# Altium PCB pcb_mk32_dsd_2022-03-23.pcbdoc
Units mil, origin at the board's own origin, x right, y up, seen from the top; angles counter-clockwise.
Board outline 3674 x 4768 mil, 2 copper layers (Top Layer, Bottom Layer); 101 components, 77 nets, 393 pads, 87 vias.
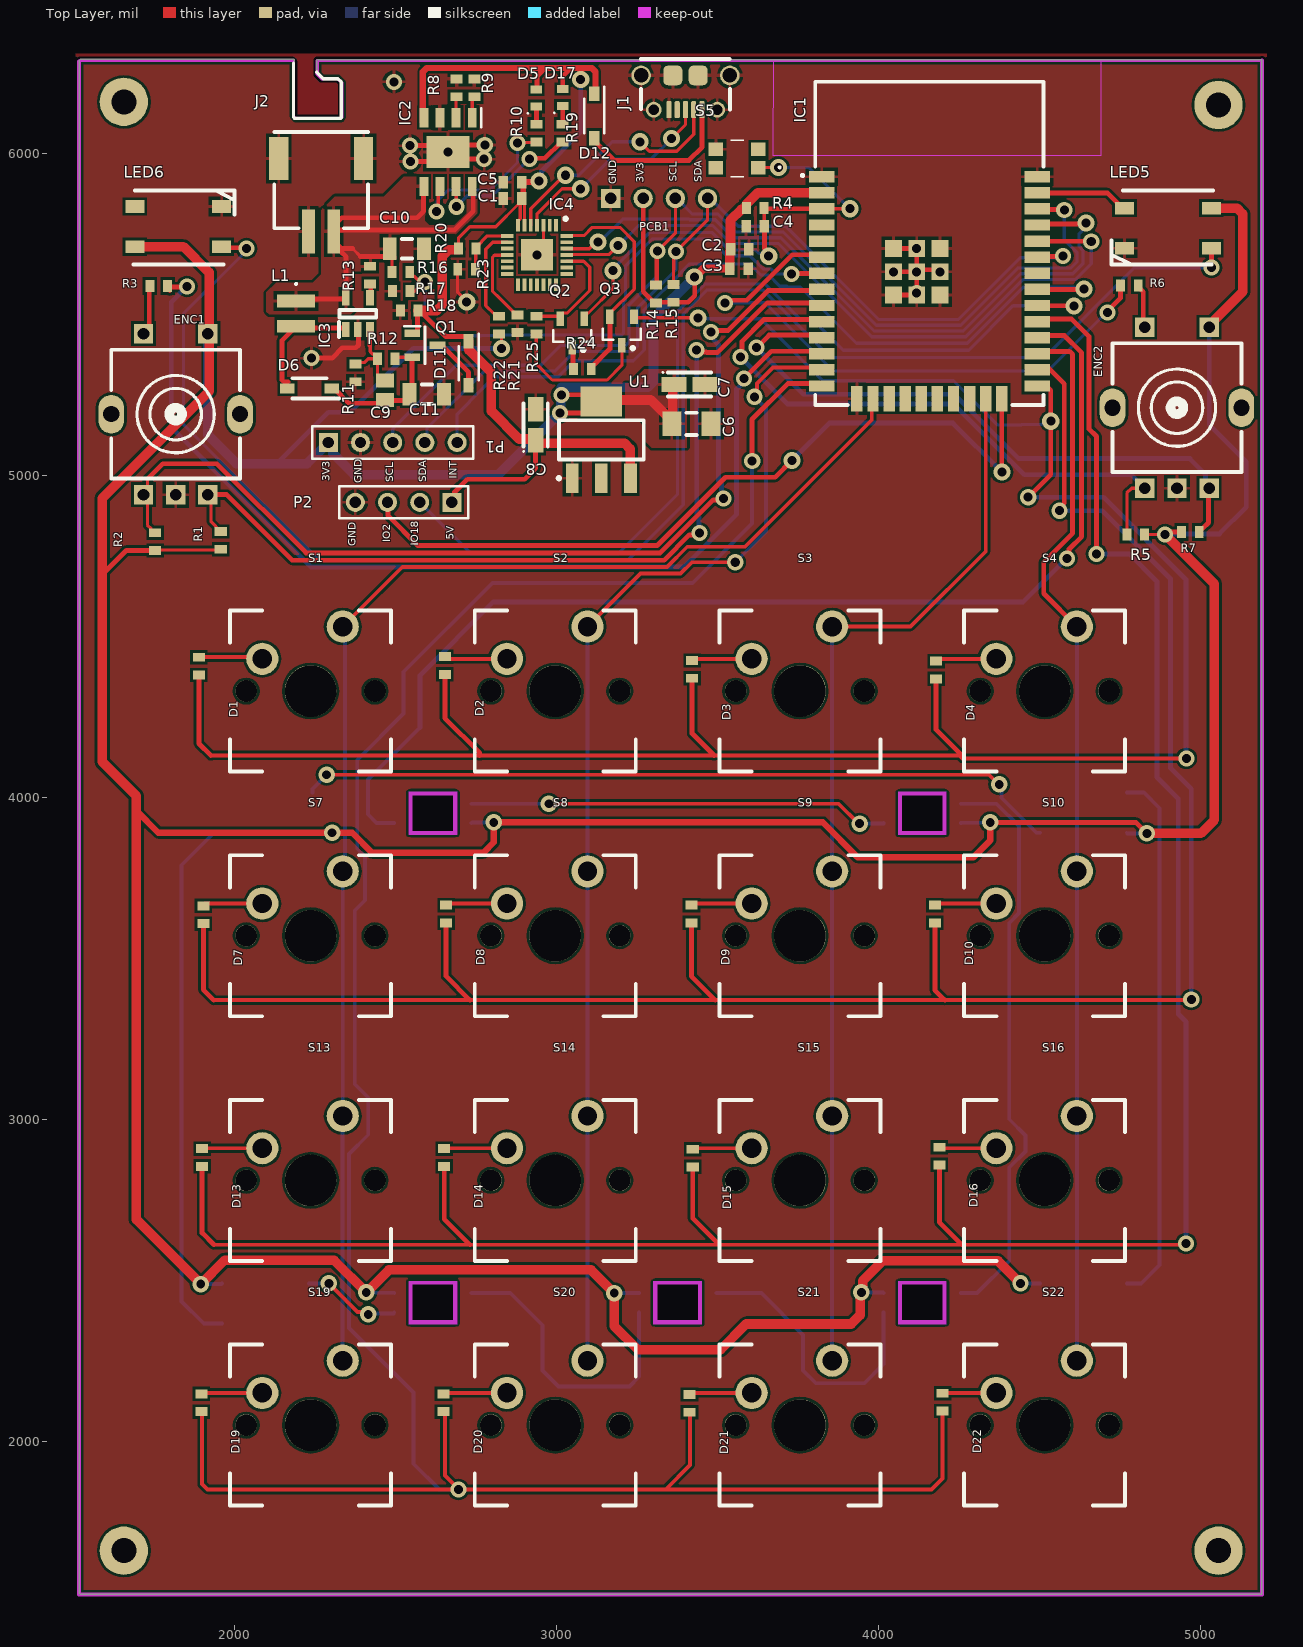
[diagram p0: Top Layer view]
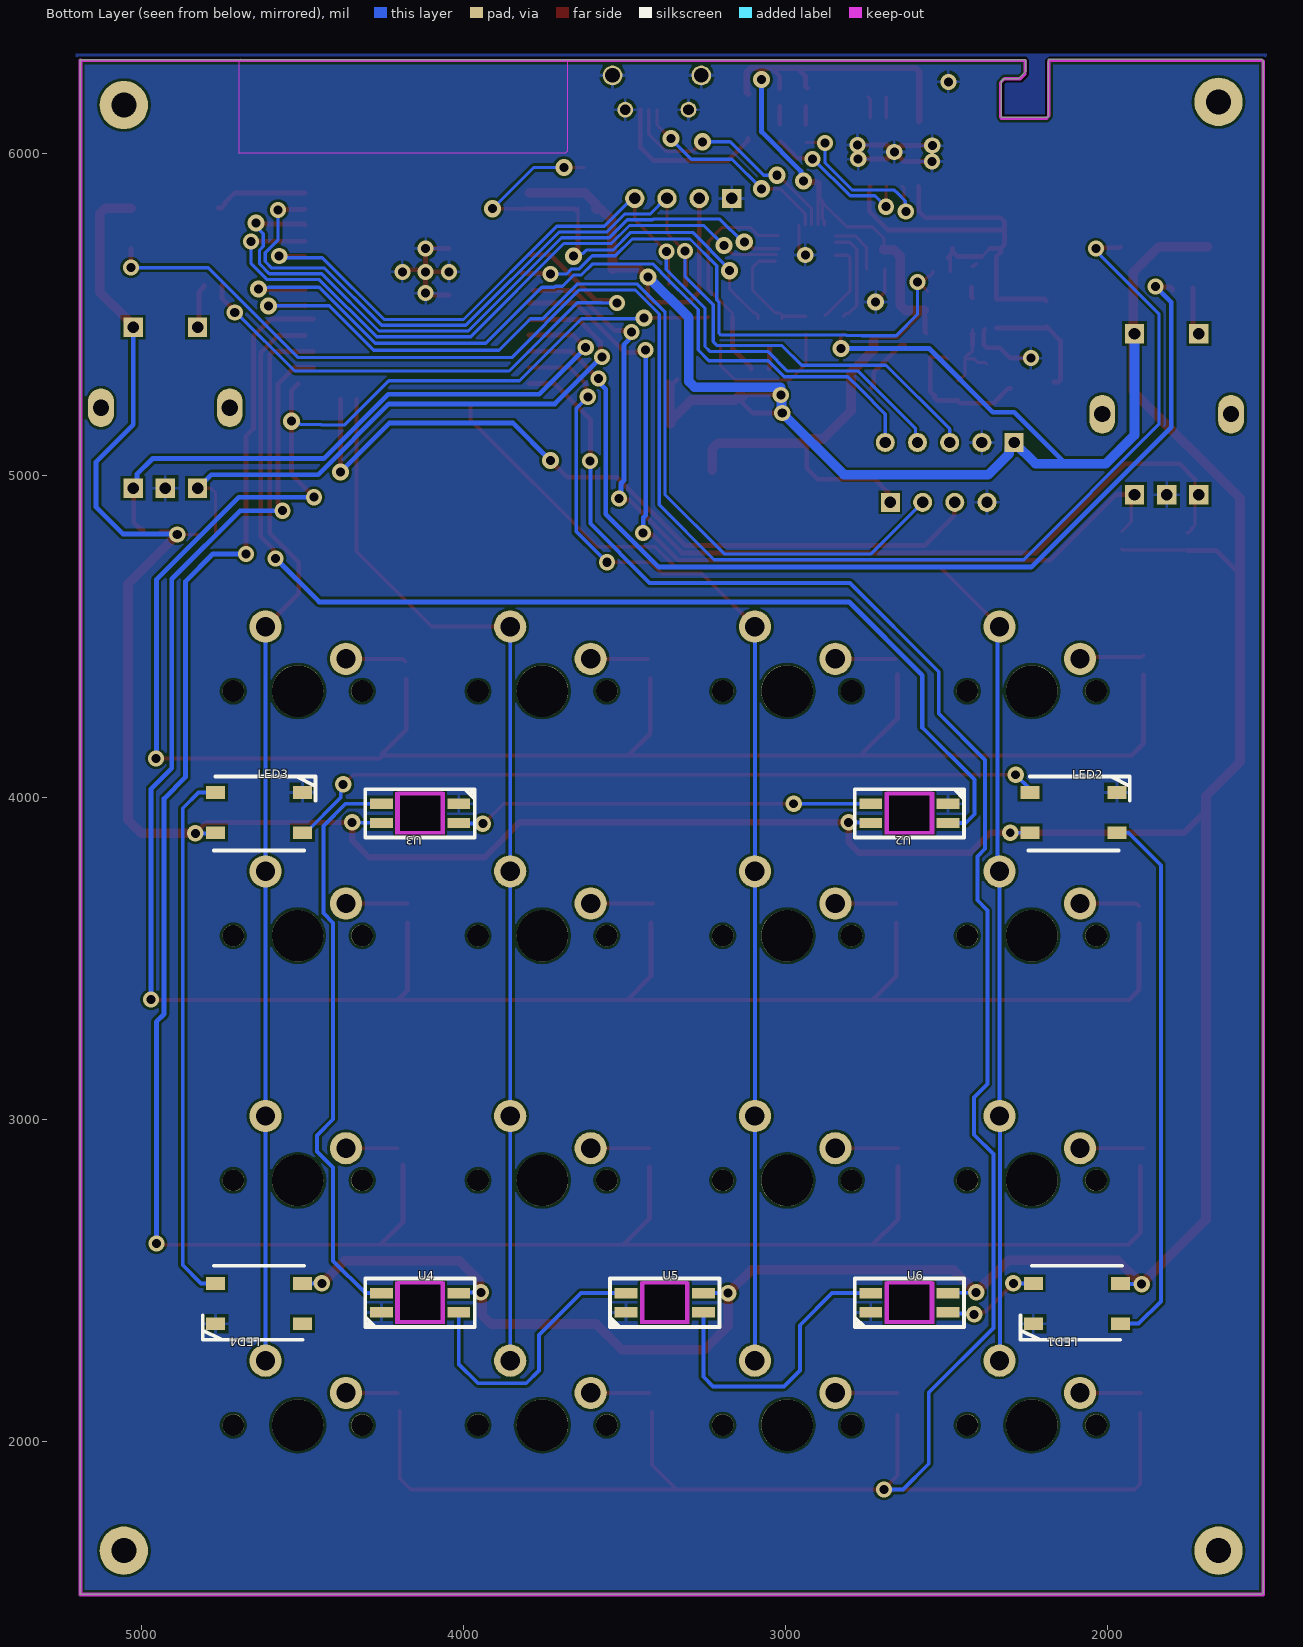
[diagram p1: Bottom Layer view, seen from below]
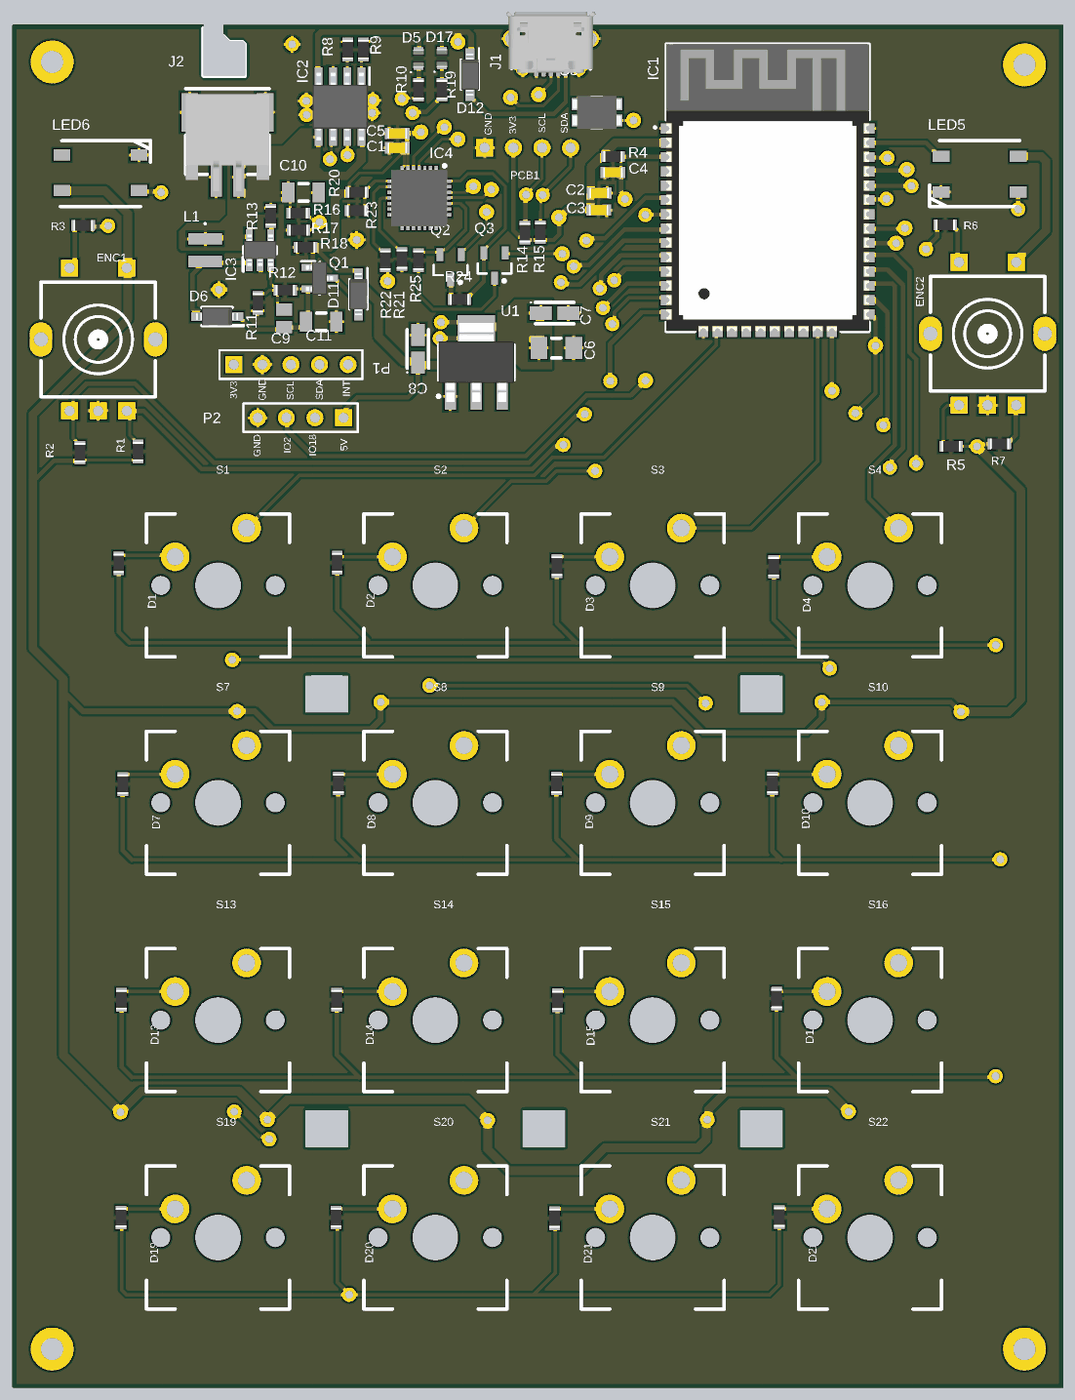
[diagram p2: 3D render of the assembled board from above, using the file's embedded part models]

## Layer stack, top to bottom
Top Solder: solder mask 0.4, Solder Resist, Dk 3.5
Top Layer: signal copper 1.4
Dielectric1: dielectric 12.6, FR-4, Dk 4.8
Bottom Layer: signal copper 1.4
Bottom Solder: solder mask 0.4, Solder Resist, Dk 3.5

## Board outline
1516,6288 1520,6292 2184,6292 2184,6112 2330,6112 2330,6224 2322,6232 2276,6232 2253.9,6254.1 2254,6290 2268.77,6290 5190,6290 5190,1524 1520,1524 1516,1528

## Design rules (kind name [scope] priority, off if disabled: settings)
Clearance [All] p1: gap=7.87 ignorepadtopadclearanceinfootprint=FALSE except(0: Arc-Hole Track-Hole SMDPad-Hole THPad-Hole Via-Hole Fill-Hole Poly-Hole Region-Hole Text-Hole)
ComponentClearance [All] p1: gap=0 collisioncheckmode=3 verticalgap=0 showdistances=FALSE
MinimumSolderMaskSliver [All] p1 off: minsoldermaskwidth=10
PolygonConnect [All] p1: connectstyle=Relief reliefconductorwidth=10 reliefentries=4 polygonreliefangle="90 Angle" airgapwidth=10
RoutingVias [All] p1: holewidth=28 width=50 viastyle="Through Hole" minholewidth=27.56 minwidth=50 maxholewidth=28 maxwidth=53.15
SilkToSilkClearance [All] p1 off: silktosilkclearance=10
SilkToSolderMaskClearance [IsPad] p1 off: minsilkscreentomaskgap=10 clearancetoexposedcopper=TRUE
SolderMaskExpansion [All] p1: expansion=4 istentingtop=FALSE
Width [All] p1: maxlimit=30 minlimit=10 preferedwidth=15 minimp=50.000000 maximp=50.000000 favimp=50.000000
26 further rules are at their usual default settings.

## Components (designator, comment, footprint, x,y, rotation, side; value= is the part's Value field where it differs from the comment)
C1 "4.7uF" C0603_N 2862,5860 r180 top
C2 "22uf" C0603_N 3568,5702 r180 top
C3 "0.1uF" C0603_N 3566,5642 r180 top
C4 "0.1uF" C0603_N 3616,5774 r0 top
C5 "0.1uF" C0603_N 2862,5910 r180 top
C6 "22uF/10V" C1206_M 3418,5160 r180 top
C7 "100uF" C_TANT_A_3216_N 3412,5282 r0 top
C8 "10uF" C_TANT_A_3216_N 2934.08,5156.93 r90 top
C9 "470pF" C0805_L 2466,5264 r90 top
C10 "2.2uF" C1206_L 2534,5704 r180 top
C11 "22uF" C1206_L 2596,5252 r180 top
D1 "1N4148TA" R0603_N#1 1888,4406 r270 top
D2 "1N4148TA" R0603_N#1 2652,4408 r270 top
D3 "1N4148TA" R0603_N#1 3420,4396 r270 top
D4 "1N4148TA" R0603_N#1 4178,4394 r270 top
D5 "Green" D0603_L 2936,6172 r90 top
D6 "MBR130T3G" SOD3716X135N 2232,5270 r180 top
D7 "1N4148TA" R0603_N#1 1902,3634 r270 top
D8 "1N4148TA" R0603_N#1 2656,3636 r270 top
D9 "1N4148TA" R0603_N#1 3418,3636 r270 top
D10 "1N4148TA" R0603_N#1 4174,3636 r270 top
D11 "MBR130T3G" SOD3716X135N 2726,5348 r270 top
D12 "MBR130T3G" SOD3716X135N 3116,6116 r270 top
D13 "1N4148TA" R0603_N#1 1898,2880 r270 top
D14 "1N4148TA" R0603_N#1 2650,2880 r270 top
D15 "1N4148TA" R0603_N#1 3422,2878 r270 top
D16 "1N4148TA" R0603_N#1 4188,2884.26 r270 top
D17 "Green" D0603_L 3018,6173.43 r90 top
D19 "1N4148TA" R0603_N#1 1896,2118.26 r270 top
D20 "1N4148TA" R0603_N#1 2648,2118.26 r270 top
D21 "1N4148TA" R0603_N#1 3412,2116.26 r270 top
D22 "1N4148TA" R0603_N#1 4198,2120 r270 top
ENC1 "EC11" EC11 1816,5190 r0 top
ENC2 "EC11" EC11 4926,5210 r0 top
IC1 "ESP32_WROOM32" ESP32WROOM32 4117.63,5632.09 r0 top
IC2 "TP4056" SOIC127P600X175-9N 2662,6004 r270 top
IC3 "LM2731XMF_NOPB" SOT95P280X145-5N 2382,5502 r90 top
IC4 "CP2102N-A02-GQFN28R" QFN50P500X500X80-29N-D 2938.52,5684.63 r270 top
J1 "MICRO_USB" "USB MICRO" 3399.37,6135.7 r180 top
J2 "1775469-2" 17754692 2268,5912 r0 top
L1 "VLS3015CX-6R8M-1" VLS3015 2190,5502 r270 top
LED1 "WS2812B" WS2812B-MIRROR 2095,2430 r180 bottom
LED2 "WS2812B" WS2812B-MIRROR 2105.47,3950 r0 bottom
LED3 "WS2812B" WS2812B-MIRROR 4635,3950 r0 bottom
LED4 "WS2812B" WS2812B-MIRROR 4635,2430 r180 bottom
LED5 "WS2812B" WS2812B-MIRROR 4898,5770 r0 top
LED6 "WS2812B" WS2812B-MIRROR 1824,5770 r180 top
P1 "Header 5" HDR1X5 2290,5102 r0 top
P2 "Header 4" HDR1X4 2674,4916 r180 top
PCB1 "SSD1306-128x64-OLED-I2C" SSD1306_GNDVCC 2776.7,4826.5 r0 top
Q1 "SI2301" SOT95P240X120-3N 2590,5404 r0 top
Q2 "MMBT3904" SOT23_N 3048,5442.29 r270 top
Q3 "MMBT3906" SOT23_N 3202,5448 r270 top
R1 "10K" R0603_N#2 1956,4798 r270 top
R2 "10K" R0603_N#2 1752,4794 r270 top
R3 "10K" R0603_N#2 1763.56,5588 r180 top
R4 "10K" R0603_N#2 3616,5830 r180 top
R5 "10K" R0603_N#2 4798,4816 r0 top
R6 "10K" R0603_N#2 4778,5590 r0 top
R7 "10K" R0603_N#2 4967.56,4824 r180 top
R8 "1.5K" R0603_N#1 2688,6202 r270 top
R9 "0" R0603_N#1 2744,6202.26 r270 top
R10 "1k/0603" R0603_N#1 2936,6064 r90 top
R11 "13.3K" R0603_N#2 2374,5318 r90 top
R12 "40.5k" R0603_N#2 2470,5362 r0 top
R13 "51K" R0603_N#2 2420,5622 r90 top
R14 "10K" R0603_N#1 3308,5562 r270 top
R15 "10K" R0603_N#1 3362,5564 r270 top
R16 "10K" R0603_N#1 2514,5632 r180 top
R17 "10K" R0603_N#1 2518,5572 r0 top
R18 "10K" R0603_N#1 2540,5512 r180 top
R19 "1k/0603" R0603_N#1 3018,6064 r90 top
R20 "22.1K" R0603_N#1 2722.86,5704 r0 top
R21 "NC" R0603_N#1 2878,5472 r90 top
R22 "2K" R0603_N#1 2820,5468 r90 top
R23 "47.5K" R0603_N#1 2720.86,5640 r0 top
R24 "10K" R0603_N#1 3078,5330 r180 top
R25 "10K" R0603_N#1 2936,5468 r90 top
S1 "MX1A-11NW" MX1A 2235,4330 r0 top
S2 "MX1A-11NW" MX1A 2995,4330 r0 top
S3 "MX1A-11NW" MX1A 3755,4330 r0 top
S4 "MX1A-11NW" MX1A 4515,4330 r0 top
S5 "EVP-AAM02W" EVPAAM02W 3560,5984 r180 top
S7 "MX1A-11NW" MX1A 2235,3570 r0 top
S8 "MX1A-11NW" MX1A 2995,3570 r0 top
S9 "MX1A-11NW" MX1A 3755,3570 r0 top
S10 "MX1A-11NW" MX1A 4515,3570 r0 top
S13 "MX1A-11NW" MX1A 2235,2810 r0 top
S14 "MX1A-11NW" MX1A 2995,2810 r0 top
S15 "MX1A-11NW" MX1A 3755,2810 r0 top
S16 "MX1A-11NW" MX1A 4515,2810 r0 top
S19 "MX1A-11NW" MX1A 2235,2050 r0 top
S20 "MX1A-11NW" MX1A 2995,2050 r0 top
S21 "MX1A-11NW" MX1A 3755,2050 r0 top
S22 "MX1A-11NW" MX1A 4515,2050 r0 top
U1 "NCP1117ST33T3G" SOT-223_M 3138,5110 r90 top
U2 "SK6812(v.2)" SK6812MINI-E 2545,3890 r180 bottom
U3 "SK6812(v.2)" SK6812MINI-E 4065,3890 r180 bottom
U4 "SK6812(v.2)" SK6812MINI-E 4205,2490 r0 bottom
U5 "SK6812(v.2)" SK6812MINI-E 3445,2490 r0 bottom
U6 "SK6812(v.2)" SK6812MINI-E 2685,2490 r0 bottom

## Footprints (in the part's own frame and the unit in brackets; to place one, negate y for a bottom-side part, rotate by r counter-clockwise, add the part's x,y. Pads: shape width x height; smd on the part's side, far side on the other; paste and mask are expansions set on the pad)
17754692 [mm]
  rect 1x3.5 smd: 1(-1,-3.925) 2(1,-3.925)
  rect 1.5x3.4 smd: MP1(-3.35,1.825) MP2(3.35,1.825)
  silkscreen extent -3.7,-3.67 3.7,3.93, body extent -3.7,-5.17 3.7,3.43, height 5.6
C0603_N [mm] "Chip Capacitor, 2-Leads, Body 1.60x0.82mm, IPC Medium Density"
  rect 0.75x1 smd: 1(-0.725,0) 2(0.725,0)
  body extent -0.87,-0.48 0.87,0.48, height 0.55
C0805_L [mm] "Chip Capacitor, 2-Leads, Body 2,00x1,25mm, IPC High Density"
  rect 1.1x1.4 smd: 1(-0.775,0) 2(0.775,0)
  body extent -1.1,-0.72 1.1,0.73, height 1.1
C1206_L [mm] "Chip Capacitor, 2-Leads, Body 3,20x1,60mm, IPC High Density"
  rect 1.1x1.75 smd: 1(-1.35,0) 2(1.35,0)
  silkscreen extent -0.4,-0.77 0.4,0.77, body extent -1.7,-0.9 1.7,0.9, height 1.35
C1206_M [mm] "Chip Capacitor, 2-Leads, Body 3,20x1,60mm, IPC Low Density"
  rect 1.5x1.95 smd: 1(-1.55,0) 2(1.55,0)
  silkscreen extent -0.4,-0.87 0.4,0.87, body extent -1.7,-0.9 1.7,0.9, height 1.35
C_TANT_A_3216_N [mm] "Molded Capacitor, 2-Leads, Body 3,20x1,60mm, IPC Medium Density"
  rect 1.95x1.2 smd: 1(-1.225,0) 2(1.225,0)
  silkscreen extent -2.15,-0.95 1.7,1, body extent -1.7,-0.9 1.7,0.9, height 1.8
D0603_L [mm] "Chip Diode, 2-Leads, Body 1.60x0.82mm, IPC High Density"
  rect 0.65x0.9 smd: 1(-0.675,0) 2(0.675,0)
  silkscreen extent -1.26,0.61 -1.16,0.71, body extent -0.85,-0.47 0.85,0.48, height 0.6
EC11 [mil]
  rect 60x60 hole 36: 1(-100,250) 2(100,250) 3(-100,-250) 4(100,-250) 5(0,-250)
  oval 80x120 hole 50: ""(-200,0) ""(200,0)
  silkscreen extent -200,-200 200,200
ESP32WROOM32 [mm]
  rect 2x0.9 smd: 1(-7.5,7.5) 2(-7.5,6.23) 3(-7.5,4.96) 4(-7.5,3.69) 5(-7.5,2.42) 6(-7.5,1.15) 7(-7.5,-0.12) 8(-7.5,-1.39) 9(-7.5,-2.66) 10(-7.5,-3.93) 11(-7.5,-5.2) 12(-7.5,-6.47) 13(-7.5,-7.74) 14(-7.5,-9.01) 25(9.5,-9.01) 26(9.5,-7.74) 27(9.5,-6.47) 28(9.5,-5.2) 29(9.5,-3.93) 30(9.5,-2.66) 31(9.5,-1.39) 32(9.5,-0.12) 33(9.5,1.15) 34(9.5,2.42) 35(9.5,3.69) 36(9.5,4.96) 37(9.5,6.23) 38(9.5,7.5)
  rect 0.9x2 smd: 15(-4.715,-10.01) 16(-3.445,-10.01) 17(-2.175,-10.01) 18(-0.905,-10.01) 19(0.365,-10.01) 20(1.635,-10.01) 21(2.905,-10.01) 22(4.175,-10.01) 23(5.445,-10.01) 24(6.715,-10.01)
  rect 1.33x1.33 smd: 39(-1.835,1.835) 40(0,1.835) 41(1.835,1.835) 42(-1.835,0) 43(0,0) 44(1.835,0) 45(-1.835,-1.835) 46(0,-1.835) 47(1.835,-1.835)
  silkscreen extent -9.1,-10.51 10,14.99, body extent -8,-10.5 10,15, height 3.15
EVPAAM02W [mm]
  rect 1.15x1.05 smd: A1(-1.675,0.725) A2(-1.675,-0.725) B1(1.675,0.725) B2(1.675,-0.725)
  silkscreen extent -3.4,-1.45 0.5,1.45, body extent -2.14,-1.45 2.14,1.45, height 2
HDR1X4 [mm] "Connector; Header; 4 Position"
  rect 1.5x1.5 hole 0.9: 1(0,0)
  round 1.5 hole 0.9: 2(2.54,0) 3(5.08,0) 4(7.62,0)
  silkscreen extent -1.27,-1.27 8.89,1.27
HDR1X5 [mm] "Connector; Header; 5 Position"
  rect 1.5x1.5 hole 0.9: 1(0,0)
  round 1.5 hole 0.9: 2(2.54,0) 3(5.08,0) 4(7.62,0) 5(10.16,0)
  silkscreen extent -1.27,-1.27 11.43,1.27
MX1A [mil]
  round 100 hole 60: 1(-150,100) 2(100,200)
  round 67 hole 67 unplated: ""(-200,0) ""(200,0)
  round 160 hole 160 unplated: ""(0,0)
  silkscreen extent -250,-250 250,250
QFN50P500X500X80-29N-D [mm]
  rect 1x0.3 smd: 1(-2.35,1.5) 2(-2.35,1) 3(-2.35,0.5) 4(-2.35,0) 5(-2.35,-0.5) 6(-2.35,-1) 7(-2.35,-1.5) 15(2.35,-1.5) 16(2.35,-1) 17(2.35,-0.5) 18(2.35,0) 19(2.35,0.5) 20(2.35,1) 21(2.35,1.5)
  rect 0.3x1 smd: 8(-1.5,-2.35) 9(-1,-2.35) 10(-0.5,-2.35) 11(0,-2.35) 12(0.5,-2.35) 13(1,-2.35) 14(1.5,-2.35) 22(1.5,2.35) 23(1,2.35) 24(0.5,2.35) 25(0,2.35) 26(-0.5,2.35) 27(-1,2.35) 28(-1.5,2.35)
  rect 2.5x2.5 smd: 29(0,0)
  silkscreen extent -2.97,2.13 -2.73,2.38, body extent -2.55,-2.55 2.55,2.55, height 0.8
R0603_N#1 [mm]
  rect 0.7x0.95 smd: 1(-0.733,0) 2(0.667,0)
  body extent -0.88,-0.48 0.82,0.48, height 0.6
R0603_N#2 [mm] "Chip Resistor, 2-Leads, Body 1.60x0.82mm, IPC Medium Density"
  rect 0.7x0.95 smd: 1(-0.7,0) 2(0.7,0)
  body extent -0.85,-0.48 0.85,0.48, height 0.6
SK6812MINI-E [mm]
  rect 1.8x0.82 smd: 1(-4.826,0.762) 2(-4.826,2.286) 3(1.27,2.286) 4(1.27,0.762)
  Keep-Out Layer board cut-out: 0.127,-0.127 -3.683,-0.127 -3.683,1.27 -3.683,3.175 0.127,3.175
  silkscreen extent -6.1,-0.38 2.54,3.43
SOD3716X135N [mm]
  rect 1.15x0.8 smd: 1(-1.75,0) 2(1.75,0)
  silkscreen extent -2.32,-0.8 1.35,0.8, body extent -1.86,-0.8 1.86,0.8, height 1.35
SOIC127P600X175-9N [mm]
  rect 1.525x0.7 smd: 1(-2.712,1.905) 2(-2.712,0.635) 3(-2.712,-0.635) 4(-2.712,-1.905) 5(2.712,-1.905) 6(2.712,-0.635) 7(2.712,0.635) 8(2.712,1.905)
  rect 2.513x3.402 smd: 9(0,0)
  silkscreen extent -3.47,2.61 -1.95,2.61, body extent -3,-2.45 3,2.45, height 1.75
SOT23_N [mm] "SOT23, 3-Leads, Body 2.9x1.3mm, Pitch 0.95mm, Lead Span 2.3mm - Reverse Pinning, IPC Medium Density"
  rect 1.15x0.6 smd: 1(1.125,0) 2(-1.125,-0.95) 3(-1.125,0.95)
  silkscreen extent -0.2,-1.5 1.47,1.5, body extent -0.7,-1.5 0.7,1.5, height 1.1
SOT95P240X120-3N [mm]
  rect 1.25x0.6 smd: 1(-1,0.95) 2(-1,-0.95) 3(1,0)
  silkscreen extent -1.63,-1.45 0.03,1.5, body extent -1.2,-1.45 1.2,1.45, height 1.2
SOT95P280X145-5N [mm]
  rect 1.2x0.6 smd: 1(-1.25,0.95) 2(-1.25,0) 3(-1.25,-0.95) 4(1.25,-0.95) 5(1.25,0.95)
  silkscreen extent -1.85,-1.45 0.3,1.5, body extent -1.4,-1.45 1.4,1.45, height 1.45
SOT-223_M [mm] "SOT223, 4-Leads, Body 6.50x7.00mm (avg), Pitch 2.30mm, IPC Low Density"
  rect 2.35x1 smd: 1(-3.025,2.3) 2(-3.025,0) 3(-3.025,-2.3)
  rect 2.35x3.3 smd: 4(3.025,0)
  silkscreen extent -3.15,-3.35 1.55,3.47, body extent -3.5,-3.35 3.5,3.35, height 1.8
SSD1306_GNDVCC [mil]
  rect 60x60 hole 36: 1(390.59,1033.48)
  round 60 hole 36: 2(491.3,1033.5) 3(591.3,1033.5) 4(691.3,1033.5)
"USB MICRO" [mm]
  rrect50% 0.4x1.35 smd: 1(-1.3,0) 2(-0.65,0) 3(0,0) 4(0.65,0) 5(1.3,0)
  round 1.55 hole 1.15: shd(-3.5,-2.7) shd(3.5,-2.7)
  round 1.25 hole 0.85: shd(-2.5,0) shd(2.5,0)
  rrect50% 1.5x1.55 smd: shd(-1,-2.7) shd(1,-2.7)
  silkscreen extent -3.5,-4 3.5,0, body extent -3.96,-5.1 4.01,0.33, height 2.68
VLS3015 [mm]
  rect 1x3 smd: 1(-1,0) 2(1,0)
  silkscreen extent -2.4,-0.05 -2.3,0.05
WS2812B-MIRROR [mil]
  rect 59.05x39.37 smd: 1(135,60) 2(135,-65) 3(-135,-65) 4(-135,60)
  silkscreen extent -175,-115 140,115

## Part data
C1 C2 C3 C4 C5 C6 C9 C10 C11: library part C_SMD
C7 C8: library part CP_SMD
D1 D2 D3 D4 D7 D8 D9 D10 D13 D14 D15 D16 D19 D20 D21 D22: BOM_Manufacturer=FAIRCHILD, BOM_Manufacturer Part=1N4148TA, BOM_Supplier=LCSC, BOM_Supplier Part=C124481, Contributor=LCSC, spicePre=D
D5 D17: library part LED_SMD, Color=Green
D6 D11 D12: "Diode", Manufacturer_Name="ON Semiconductor", Mouser Part Number=863-MBR130T3G, Arrow Part Number=MBR130T3G, Arrow Price/Stock=https://www.arrow.com/en/products/mbr130t3g/on-semiconductor?region=nac, Datasheet Link=http://www.onsemi.com/pub/Collateral/MBR130T1-D.PDF, Height=1.35mm, Manufacturer_Part_Number=MBR130T3G, Mouser Price/Stock=https://www.mouser.co.uk/ProductDetail/ON-Semiconductor/MBR130T3G?qs=3JMERSakeboBlzSl4dGpZQ%3D%3D
ENC1 ENC2 PCB1: BOM_Manufacturer Part=?
  ENC1 ENC2: sourceId=_kcy86s1ZJ, spicePre=E
  PCB1: sourceId=wICUcuL3l, spicePre=X, timeStamp=1456014235
IC1: "Integrated Circuit", Manufacturer_Name="Espressif Systems", Manufacturer_Part_Number="ESP32 WROOM32", Datasheet Link=https://www.espressif.com/sites/default/files/documentation/esp32-wroom-32_datasheet_en.pdf, Height=3.2mm
IC2: "Connector", Manufacturer_Name="NanJing Top Power", Datasheet Link=https://dlnmh9ip6v2uc.cloudfront.net/datasheets/Prototyping/TP4056.pdf, Height=1.75mm, Manufacturer_Part_Number=TP4056
IC3: "Integrated Circuit", Arrow Part Number=LM2731XMF/NOPB, Manufacturer_Name="Texas Instruments", Mouser Part Number=926-LM2731XMF/NOPB, Arrow Price/Stock=https://www.arrow.com/en/products/lm2731xmfnopb/texas-instruments, Datasheet Link=http://www.ti.com/lit/ds/symlink/lm2731.pdf, Height=1.45mm, Manufacturer_Part_Number=LM2731XMF/NOPB, Mouser Price/Stock=https://www.mouser.co.uk/ProductDetail/Texas-Instruments/LM2731XMF-NOPB?qs=X1J7HmVL2ZH57kOOlof8Rg%3D%3D
IC4: "Integrated Circuit", Manufacturer_Name="Silicon Labs", Mouser Part Number=634-CP2102NA02QFN28R, Arrow Part Number=CP2102N-A02-GQFN28R, Arrow Price/Stock=https://www.arrow.com/en/products/cp2102n-a02-gqfn28r/silicon-labs, Datasheet Link=https://www.silabs.com/documents/public/data-sheets/cp2102n-datasheet.pdf, Height=0.8mm, Manufacturer_Part_Number=CP2102N-A02-GQFN28R, Mouser Price/Stock=https://www.mouser.co.uk/ProductDetail/Silicon-Labs/CP2102N-A02-GQFN28R?qs=u16ybLDytRag4qKvSH3fTw%3D%3D
J1: "CONN USB MICRO B RECPT SMT R/A", Manufacturer=FCI, Manufacturer Part Number=10118194-0001LF, Supplier Part Number 1=609-4618-1-ND, Category="Connectors, Interconnects", ComponentLink1Description=http://portal.fciconnect.com/Comergent//fci/drawing/10118194.pdf, ComponentLink1URL=http://portal.fciconnect.com/Comergent//fci/drawing/10118194.pdf, Connector Type="USB - micro B", Features="Shielded, Solder Retention", Gender=Receptacle, Ingress Protection=-, Mounting Type="Surface Mount, Right Angle, Horizontal", Number of Contacts=5, Packaging="Cut Tape (CT)", Pricing 1="1=0.46, 10=0.433, 25=0.3712, 50=0.3156, 100=0.3032, 250=0.27224, 500=0.25988 (USD)", RoHS="RoHS Compliant", Specifications="USB 2.0", Stock 1=9139, Supplier 1=Digi-Key
J2: "Connector", Manufacturer_Name="TE Connectivity", Mouser Part Number=571-1775469-2, Arrow Part Number=1775469-2, Arrow Price/Stock=https://www.arrow.com/en/products/1775469-2/te-connectivity, Datasheet Link=https://www.te.com/commerce/DocumentDelivery/DDEController?Action=showdoc&DocId=Customer+Drawing%7F1775469%7FA5%7Fpdf%7FEnglish%7FENG_CD_1775469_A5.pdf%7F1775469-2, Height=5.65mm, Manufacturer_Part_Number=1775469-2, Mouser Price/Stock=https://www.mouser.co.uk/ProductDetail/TE-Connectivity/1775469-2/?qs=fvVej%2FMj3jdYOde%252BssG5lg%3D%3D
L1: "Inductor", Manufacturer_Name=TDK, Mouser Part Number=810-VLS3015CX6R8M1, Datasheet Link=https://product.tdk.com/system/files/dam/doc/product/inductor/inductor/smd/catalog/inductor_commercial_power_vls3015cx-1_en.pdf, Manufacturer_Part_Number=VLS3015CX-6R8M-1, Mouser Price/Stock=https://www.mouser.co.uk/ProductDetail/TDK/VLS3015CX-6R8M-1?qs=vmHwEFxEFR%252BS4khwfBFH0w%3D%3D
P1: "Header, 5-Pin", LatestRevisionDate=17-Jul-2002, LatestRevisionNote="Re-released for DXP Platform.", Publisher="Altium Limited"
P2: "Header, 4-Pin", LatestRevisionDate=17-Jul-2002, LatestRevisionNote="Re-released for DXP Platform.", Publisher="Altium Limited"
Q1: "MOSFET (P-Channel)", Manufacturer_Name=PUOLOP, Datasheet Link=https://datasheet.lcsc.com/szlcsc/1901091236_PUOLOP-SI2301_C351397.pdf, Height=1.2mm, Manufacturer_Part_Number=SI2301
Q2: "NPN Switching Transistor", Current - Collector (Ic) (Max)=200mA, Current - Collector Cutoff (Max)=-, DC Current Gain (hFE) (Min) @ Ic, Vce="100 @ 10mA, 1V", Frequency - Transition=300MHz, Manufacturer="Micro Commercial Co", Manufacturer Part Number=MMBT3904-TP, Package / Case="TO-236-3, SC-59, SOT-23-3", Power - Max=350mW, Supplier Device Package=SOT-23, Supplier Part Number 1=MMBT3904TPMSCT-ND, Voltage - Collector Emitter Breakdown (Max)=40V, Category="Discrete Semiconductor Products", ComponentLink1Description="Manufacturer Link", ComponentLink1URL=http://www.semiconductors.philips.com/, ComponentLink2Description=Datasheet, ComponentLink2URL=http://www.semiconductors.philips.com/acrobat/datasheets/MMBT3904_4.pdf, ComponentLink3Description=http://www.mccsemi.com/up_pdf/MMBT3904(SOT-23).pdf, ComponentLink3URL=http://www.mccsemi.com/up_pdf/MMBT3904(SOT-23).pdf, DatasheetVersion=13-May-2002, LatestRevisionDate=12-Dec-2006, LatestRevisionNote="IPC-7351 Footprint Added.", Mounting Type="Surface Mount", PackageDescription="3-Pin SOT-23 Package 0.95 mm Pitch, 2.3 mm Lead Span", PackageReference=SOT23, PackageVersion=May-1999, Packaging="Cut Tape (CT)", Pricing 1="1=0.14, 10=0.127, 25=0.116, 100=0.0834, 250=0.04916, 500=0.04078, 1000=0.02781 (USD)", Published=17-Sep-2003, Publisher="Altium Limited", RoHS="RoHS Compliant", Stock 1=101484, Supplier 1=Digi-Key, Transistor Type=NPN, Vce Saturation (Max) @ Ib, Ic="300mV @ 5mA, 50mA"
Q3: "PNP Switching Transistor", ComponentLink1Description="Manufacturer Link", ComponentLink1URL=http://www.semiconductors.philips.com/, ComponentLink2Description=Datasheet, ComponentLink2URL=http://www.semiconductors.philips.com/acrobat/datasheets/MMBT3906_2.pdf, DatasheetVersion=11-Apr-2000, LatestRevisionDate=12-Dec-2006, LatestRevisionNote="IPC-7351 Footprint Added.", PackageDescription="3-Pin SOT-23 Package 0.95 mm Pitch, 2.3 mm Lead Span", PackageReference=SOT23, PackageVersion=May-1999, Published=17-Sep-2003, Publisher="Altium Limited"
R1 R2 R3 R4 R5 R6 R7 R8 R9 R10 R11 R12 R13 R14 R15 R16 R17 R18 R19 R20 R21 R22 R23 R24 R25: library part R_SMD
S5: "Switch", Manufacturer_Name=Panasonic, Mouser Part Number=667-EVP-AAM02W, Allied Price/Stock=https://www.alliedelec.com/panasonic-evp-aam02w/70900257/, Allied_Number=70900257, Datasheet Link=https://industrial.panasonic.com/cdbs/www-data/pdf/ATK0000/ATK0000C372.pdf, Height=1.9mm, Manufacturer_Part_Number=EVP-AAM02W, Mouser Price/Stock=https://www.mouser.com/Search/Refine.aspx?Keyword=667-EVP-AAM02W
U1: "IC REG LINEAR 3.3V 1A SOT223", Base Part Number=NCP1117ST33, Current - Output=1A, Manufacturer="ON Semiconductor", Operating Temperature="0°C ~ 125°C", Package / Case="TO-261-4, TO-261AA", Supplier Device Package=SOT-223, Supplier Part Number 1=NCP1117ST33T3GOSCT-ND, Voltage - Input (Max)=20V, Voltage - Output (Max)=-, Voltage - Output (Min/Fixed)=3.3V, Voltage Dropout (Max)="1.2V @ 800mA", Category="Integrated Circuits (ICs)", ComponentLink1Description=http://www.onsemi.com/pub/Collateral/NCP1117-D.PDF, ComponentLink1URL=http://www.onsemi.com/pub/Collateral/NCP1117-D.PDF, Control Features=-, Manufacturer Part Number=NCP1117ST33T3G, Mounting Type="Surface Mount", Output Configuration=Positive, Output Type=Fixed, Packaging="Cut Tape (CT)", Part Status=Active, Pricing 1="1=0.52, 10=0.444, 100=0.3315, 500=0.26048, 1000=0.20129 (USD)", Protection Features="Over Current, Over Temperature", PSRR="64dB (120Hz)", RoHS="RoHS Compliant", Stock 1=49501, Supplier 1=Digi-Key
LED1 LED2 LED3 LED4 LED5 LED6: Contributor=ridgy, spicePre=L, spiceSymbolName=WS2812B
S1 S2 S3 S4 S7 S8 S9 S10 S13 S14 S15 S16 S19 S20 S21 S22: BOM_Manufacturer Part=MX1A-11NW, BOM_Supplier=Mouser, BOM_Supplier Part=540-MX1A-11NW, link=http://cherryamericas.com/wp-content/uploads/2014/12/mx_cat.pdf, spicePre=S
U2 U3 U4 U5 U6: Contributor=PetrSlachta, spicePre=U, spiceSymbolName=SK6812(v.2)

## Free pads (board coordinates)
  round 150 hole 78: 40(1655,1660) 40(1655,6160) 40(5055,1660) 40(5055,6150)

## Via types
v1: diameter 50, hole 28, Top Layer to Bottom Layer, 50 vias
v2: diameter 53.15, hole 28, Top Layer to Bottom Layer, 22 vias
v3: diameter 51.18, hole 27.56, Top Layer to Bottom Layer, 15 vias

## Nets (pads, with @x,y where several pads share a name; then routed paths per layer and width w, separated by ;. In a path a pad name is that pad's centre, name@x,y a point inside that pad or via, vN(x,y) a via of type N, cw(c..) or ccw(c..) an arc to the next point about the centre after c; other vN are vias at no path point)
3V3: C2.2 C3.2 C6.2 C7.1 ENC1.2 ENC2.2 IC1.2 LED1.1 LED2.1 LED3.1 LED4.1 LED5.1 LED6.1 P1.1 PCB1.2 R1.2 R2.2 R4.2 R5.2 R7.2 R14.2 R15.2 R22.1 U1.2 U1.4 U2.1 U3.1 U4.1 U5.1 U6.1 | length 18884.6
  Top Layer w10: R2.2 1754,4768.44 1954,4768.44 R1.2 ; R22.1 2828,5431.14 v2(2828,5393.7) ; v1@3006.9,5257.65 v1(3014.56,5250) ; R5.2 v1(4889.12,4816)
  Top Layer w15: 1588,4692 1662.44,4766.44 R2.2 ; v1(3010,5194) 3102.91,5194 U1.4 3117.09,5250 v1(3014.56,5250) ; PCB1.2 3268,5570.82 3301.08,5537.74 R15.2 3407.74,5537.74 3428,5558 3428,5615.31 v2(3426.76,5616.55) ; C7.1@3336,5298.12 3352.12,5282 C7.1 ; v3(4346,3922) 4798.53,3922 v3(4832.54,3888) ; v1(4889.12,4816) 4897.12,4824 R7.2
  Top Layer w20: 1694,3958 1762,3890 v3(2302,3890) 2364,3890 2426,3828 2772,3828 2804,3860 v3(2804,3922) 3826,3922 3934,3814 4294,3814 4346,3866 v3(4346,3922)
  Top Layer w25: C7.1 C7.1@3365.28,5283.51 ; v2(3426.76,5616.55) 3430.17,5616.55 3455.62,5642 C3.2@3535.19,5642
  Top Layer w30: LED6.1 1840,5710 1920,5630 1920,5261 1588,4929 1588,4692 1588,4110 1694,4004 1694,3958 1694,2688 v3(1894,2488) 1968,2562 2308,2562 v3(2408,2462) 2478,2532 3106,2532 v3(3178,2460) 3178,2358 3252,2284 3508,2284 3588,2364 3914,2364 3941.95,2391.95 3941.95,2457.95 3949.92,2465.92 3949.92,2497.92 4012,2560 4370,2560 v3(4440,2490) ; U1.4@3138,5253.09 3157.09,5234 3291.83,5234 3356.98,5168.86 C6.2 3360.37,5163.4 3360.37,5278.6 C7.1 ; C3.2@3537.46,5639.74 C3.2 3537.46,5695.55 C2.2@3539.46,5697.55 ; C2.2 3539.22,5702.24 3539.22,5792.56 3572.96,5826.3 3587.22,5826.3 3588.44,5827.52 3588.44,5842.44 3624,5878 IC1.2@3794.84,5878 ; v3(4832.54,3888) 5000,3888 5042,3930 5042,4663.12 v1(4889.12,4816) ; ENC2.2 5041,5475 5041,5481 5130,5570 5130,5812.43 5112.43,5830 LED5.1
  Bottom Layer w12: v3(1894,2488) 1958,2488 LED1.1 ; LED2.1 v3(2302,3890) ; v3(2408,2462) 2409,2461 2494,2461 U6.1 ; U2.1 2737,3922 v3(2804,3922) ; v3(3178,2460) U5.1 ; v3(3946,2462) 4013,2462 U4.1 ; U3.1 4256,3921 4345,3921 v3(4346,3922) ; v3(4440,2490) LED4.1 ; LED3.1 4772,3888 v3(4832.54,3888)
  Bottom Layer w15: 2130,5036 2290,5196 2356,5196 2553.95,5393.95 2827.75,5393.95 v2(2828,5393.7) ; v1@4871.17,4818 5057.77,4818 5141,4901.23 5141,5042 5026,5157 ENC2.2
  Bottom Layer w30: ENC1.2 1916,5124.96 2004.96,5036 2130,5036 2224,5036 P1.1 ; P1.1@2300,5092 2304.53,5087.47 2304.53,5067.47 2370,5002 2818,5002 v1(3010,5194) 3012.28,5196.28 3012.28,5247.72 v1(3014.56,5250) 3014.56,5274 3282.43,5274 3300,5291.57 3300,5489.79 v2(3426.76,5616.55)
5V: C1.1 C5.1 C8.1 D5.2 D11.1 D12.1 D17.2 IC2.4 IC4.6 IC4.7 P2.1 Q1.1 R18.1 R20.1 U1.3 | length 3662.4
  Top Layer w10: R20.1 2694,5736 2730,5772 2810,5772 2880.78,5842.78 2880.78,5845.69 2886.82,5851.73 2890.54,5855.46 C1.1 ; IC4.7 2879.46,5790.93 2886,5797.46 C1.1@2886,5852.54 ; C1.1@2892.54,5860.69 C5.1@2892.54,5912 ; IC4.6 2899.15,5860 C5.1@2899.15,5900.53 ; v2@2935.74,5906.38 2905,5906.38 C5.1@2899.15,5900.53 ; v2@2937.43,5904.7 2944,5911.27 v2(2944,5914.64) 2902.31,5914.64 2899.15,5911.48 C5.1@2899.15,5900.53
  Top Layer w15: Q1.1@2562.55,5441.4 2566.86,5445.71 R18.1@2566.86,5494 ; 2585.2,5500.8 2654.81,5431.19 2717.75,5431.19 2726,5422.94 D11.1 ; 2682,4948 2722,4988 2900,4988 2934.08,5022.08 C8.1 ; D5.2@2932.92,6202.57 2938.22,6207.87 2938.22,6240.22 2963.13,6265.13 ; D17.2 3018,6239.13 3044,6265.13
  Top Layer w20: IC2.4@2584,6099.32 2584,6253.41 2595.72,6265.13 2963.13,6265.13 3044,6265.13 3074,6265.13 ; v2(3074,6230) 3074,6265.13 ; D12.1 3120,6188.9 3120,6253.41 3108.28,6265.13 3074,6265.13
  Top Layer w30: R18.1 2585.2,5512 2626.43,5512 2644,5529.57 2644,5681.51 2662.79,5700.3 2692.78,5700.3 2694,5701.52 R20.1 ; D11.1 2726.75,5416.15 2726.75,5389.25 2796.35,5319.65 2796.35,5199.65 2883.03,5112.97 2929.81,5112.97 C8.1 2934.08,5108.62 2942.7,5100 3210.26,5100 3227.83,5082.43 U1.3@3227.83,5015.62
  Bottom Layer w15: v2(2944,5914.64) 2952.26,5922.89 2952.26,5944.81 3074,6066.55 v2(3074,6230)
"Battery lvl": IC1.7 R16.1 R17.2 | length 1754
  Top Layer w10: R16.1 2542.86,5627.08 2551.64,5618.3 2556.56,5618.3 2567.2,5607.65 2582.35,5607.65 v1(2590,5600) ; 2558.26,5572 v1@2586.26,5600
  Top Layer w15: v1(3729.3,5625.3) 3730.34,5626.34 3815.41,5626.34 IC1.7@3822.35,5633.28
  Bottom Layer w10: v1(2590,5600) 2590,5500 2656.31,5433.69 2763.94,5433.69 2764.25,5434 2808.98,5434 2810.62,5435.65 3200.65,5435.65 3206.5,5441.5 3206.5,5537.78 3213.45,5544.73 3213.45,5650.89 3296.55,5734 3476,5734 3528.18,5681.82 3599.53,5681.82 3640.25,5641.1 3664.04,5641.1 3679.84,5625.3 v1(3729.3,5625.3)
CHR: IC2.7 R19.1 | length 460.5
  Top Layer w10: IC2.7@2685.89,5896.11 IC2.7 ; v1(2687.75,5834.25) 2687.38,5834.62 2687.38,5878.67 IC2.7@2688,5879.29
  Top Layer w15: v1(2915.44,5982) 2918.44,5985 2962.94,5985 3013.08,6035.14 R19.1
  Bottom Layer w10: v1(2687.75,5834.25) 2688.11,5834.25 2721.86,5868 2799.15,5868 2913.15,5982 v1(2915.44,5982)
"col 0": IC1.16 S1.2 S7.2 S13.2 S19.2 | length 4239
  Top Layer w12: S1.2 2519.88,4714.88 3341.8,4714.88 3404.92,4778 3584,4778 3978,5172 IC1.16@3978,5215.98
  Bottom Layer w12: S19.2 2334.13,2250.87 2334.13,2984.77 2335,2985.65 S7.2 2341.46,3776.46 2341.46,4523.54 S1.2
"col 1": IC1.13 S2.2 S8.2 S14.2 S20.2 | length 3631.1
  Top Layer w12: S2.2 3260,4695 3384.36,4695 3419.36,4730 v1(3554,4730) ; v1(3614,5244) 3621.27,5251.27 3621.27,5285.59 3670.71,5335.03 IC1.13@3796.72,5335.03
  Bottom Layer w12: S20.2 S14.2 S8.2 S2.2 ; v1(3554,4730) 3650,4826 3650,5208 v1(3614,5244)
"col 2": IC1.23 S3.2 S9.2 S15.2 S21.2 | length 3328.3
  Top Layer w12: S3.2 4098.57,4530 4332,4763.43 IC1.23
  Bottom Layer w12: S21.2 S15.2 S9.2 S3.2
"col 3": IC1.27 S4.2 S10.2 S16.2 S22.2 | length 3345.8
  Top Layer w15: IC1.27@4466.02,5385.03 4593.21,5385.03 4602,5376.24 4602,4820 4512,4730 4512,4633 S4.2
  Bottom Layer w12: S22.2 S16.2 S10.2 S4.2
D+: IC4.4 J1.3 | length 657.2
  Top Layer w10: IC4.4 2938.52,5812.52 3016,5890 v2(3074,5890) ; v2(3356,6046) 3399.37,6089.37 J1.3
  Bottom Layer w10: v2(3074,5890) 3166,5982 3292,5982 v2(3356,6046)
D-: IC4.5 J1.2 | length 753.7
  Top Layer w10: IC4.5 2918.83,5828.11 3022.72,5932 v2(3026.27,5932) ; v2(3258,6036) 3287.45,6006.55 3372.34,6006.55 3424.96,6059.17 J1.2
  Bottom Layer w10: v2(3026.27,5932) 3068,5932 3172,6036 v2(3258,6036)
DTR: IC4.28 Q3.2 R24.1 | length 698.3
  Top Layer w10: IC4.28@3021.59,5744.59 3084.14,5744.59 3109.55,5770 3196,5770 3240,5726 3240,5578.52 3164.6,5503.12 Q3.2
  Top Layer w15: R24.1 3106.86,5334.92 3164.6,5392.66 Q3.2
EN: C4.2 IC1.3 Q2.3 R4.1 S5.A1 | length 1501.8
  Top Layer w10: Q2.3 3085.4,5497.41 3092.21,5504.22 3098.22,5504.22 3174,5580 v2(3174,5635.53) ; S5.A1 3626.49,5956 v2(3688,5956) ; R4.1 3644.05,5829.51 3644.05,5824 3644.05,5774.49 C4.2 ; IC1.3 3822.98,5828 v2(3910,5828)
  Top Layer w15: C4.2 3644.54,5704.33 3658,5690.87 v2(3658,5680.55) ; R4.1@3650.54,5824 3654.54,5828 IC1.3@3814.29,5828
  Bottom Layer w10: v2(3174,5635.53) 3174,5640.26 3288.11,5754.37 3480.9,5754.37 3535.58,5699.7 3618.3,5699.7 3629.19,5688.81 3649.74,5688.81 v2(3658,5680.55) ; v2(3688,5956) 3782,5956 v2(3910,5828)
"encoder A1": ENC1.3 IC1.8 R2.1 | length 3065.4
  Top Layer w10: 1728.13,4988.13 1728.13,4940 1728.13,4845.43 1738.3,4835.26 1738.3,4830.34 1747.08,4821.56 R2.1
  Top Layer w15: 1728.13,4988.13 1776,5036 1944,5036 2220.87,4759.13 3321.13,4759.13 3485.49,4923.49 3512.59,4923.49 v1(3517.63,4928.53) ; v1(3478.76,5445.16) 3483.66,5450.06 3532,5450.06 3577.19,5495.25 3655.82,5573.88 IC1.8@3784.6,5573.88
  Bottom Layer w15: v1(3478.76,5445.16) 3485.46,5438.46 3485.46,5422.43 3502,5405.89 3502,4983.53 3510.93,4974.6 3510.93,4935.23 v1(3517.63,4928.53)
"encoder A2": ENC2.3 IC1.10 R5.1 | length 1914.6
  Top Layer w10: R5.1 4770.44,4945.44 4785,4960 ENC2.3
  Top Layer w15: v1(3570.2,5368) 3574.68,5372.47 3574.68,5415.5 3643.18,5484 IC1.10@3795.69,5484
  Bottom Layer w15: v1(3570.2,5368) 3716.2,5222 4231.65,5222 4451.65,5002 4743,5002 4784,5002 ENC2.3
"encoder B1": ENC1.4 IC1.9 R1.1 | length 2763.9
  Top Layer w10: ENC1.4@1926,4930 1926,4855.56 R1.1
  Top Layer w15: ENC1.4 1974,4940 2177.75,4736.25 3332.95,4736.25 3411.76,4815.06 3436.51,4815.06 v1(3442.72,4821.28) ; v1(3434.18,5389.4) 3440.88,5382.7 3464.2,5382.7 3465.28,5381.63 3499.63,5381.63 3653.52,5535.52 IC1.9@3796.24,5535.52
  Bottom Layer w15: v1(3434.18,5389.4) 3434.18,4876.28 3441.68,4868.78 3441.68,4822.32 v1(3442.72,4821.28)
"encoder B2": ENC2.4 IC1.11 R7.1 | length 1923.4
  Top Layer w15: v1(3620.4,5396.8) 3659.12,5435.52 IC1.11@3796.24,5435.52 ; R7.1 4995.12,4828.92 5001.4,4835.2 5006.32,4835.2 5024,4852.88 ENC2.4@5024,4931
  Bottom Layer w15: v1(3620.4,5396.8) 3765.2,5252 4234,5252 4434,5052 4966,5052 5014.29,5003.71 5014.29,4982.5 5021.74,4975.04 ENC2.4@5042.96,4975.04
"encoder S1": IC1.12 R3.1 | length 3204.2
  Top Layer w15: R3.1@1797.56,5574 1797.56,5578.92 1803.4,5584.76 1848.76,5584.76 v1(1850.9,5586.9) ; v1(3580.91,5300.2) 3665.85,5385.15 IC1.12@3796.61,5385.15
  Bottom Layer w15: v1(1850.9,5586.9) 1802,5538 1802,5149.65 2236.53,4715.13 3393.67,4715.13 3558,4879.46 3558,5267.82 3580.91,5290.73 v1(3580.91,5300.2)
"encoder S2": IC1.6 R6.1 | length 1773.2
  Top Layer w15: v1(3522.77,5535.63) v1@3522.77,5545.1 ; v1@3543.38,5544 3590,5544 3650,5604 3731.03,5685.03 IC1.6@3796.72,5685.03 ; v1(4710.55,5505.45) 4710.55,5510.55 4750.44,5550.44 R6.1
  Bottom Layer w10: v1(3522.77,5535.63) 3572,5535.63 3572.37,5536 3646.37,5536 3858.37,5324 4524,5324 4705.45,5505.45 v1(4710.55,5505.45)
GND: C1.2 C2.1 C3.1 C4.1 C5.2 C6.1 C7.2 C8.2 C10.1 C11.1 ENC1.5 ENC2.5 IC1.1 IC1.15 IC1.38 IC1.39 IC1.40 IC1.41 IC1.42 IC1.43 IC1.44 IC1.45 IC1.46 IC1.47 IC2.3 IC2.9 IC3.2 IC4.3 IC4.29 J1.5 J1.shd J2.1 J2.MP1 J2.MP2 LED1.3 LED2.3 LED3.3 LED4.3 LED5.3 LED6.3 P1.2 P2.4 PCB1.1 R8.1 R9.1 R11.1 R17.1 R18.2 R21.1 R23.1 S5.B2 U1.1 U2.3 U3.3 U4.3 U5.3 U6.3 | length 1366.1
  Top Layer w10: R23.1 2691.72,5639.72 2691.72,5568.52 2720,5540.24 v2(2720,5538) ; v1(2938.52,5684.63) 2958.2,5704.31 IC4.3
  Top Layer w15: v1(2238,5364) 2302,5364 2334,5396 2375.21,5396 2384,5404.79 2384,5450.79 IC3.2 ; v1(2544,6024) 2642,6024 v1(2662,6004) ; v1(2545,5975) 2633,5975 v1(2662,6004) ; v1(2774,5982) 2684,5982 v1(2662,6004) ; v1(2776,6026) 2684,6026 v1(2662,6004) ; IC1.45 IC1.46 v1(4117.63,5632.09) ; v1(4045.39,5632.09) v1(4117.63,5632.09) ; IC1.39 v1(4117.63,5704.34) v1(4117.63,5632.09) ; IC1.46@4114.68,5562.8 v1(4117.63,5565.75) ; IC1.43@4117.63,5638.72 4183.24,5638.72 v1(4189.87,5632.09)
  other v1: 2494,6222
INT: IC1.31 P1.5 | length 2626.8
  Top Layer w15: P1.5 P1.5@2691.05,5103.05 ; IC1.31 4492.33,5576.69 4634.64,5576.69 v2(4636.96,5579)
  Bottom Layer w10: P1.5 2690,5190 2768.3,5268.3 2806,5306 3003.6,5306 3053.6,5356 3238,5356 3271.13,5389.13 3271.13,5515.13 3387.31,5631.31 3387.31,5632.89 3410.42,5656 3600.07,5656 3633.84,5622.23 3657.64,5622.23 3692.44,5587.43 3714.57,5587.43 3718,5584 3756.63,5584 3930.62,5410 4274.73,5410 4448.72,5584 4606.14,5584 4606.84,5583.3 4632.66,5583.3 v2(4636.96,5579)
IO0: D1.2 D2.2 D3.2 D4.2 IC1.25 Q3.3 | length 7117
  Top Layer w10: Q3.3 3242.51,5489.19 v2(3438.81,5489.19)
  Top Layer w12: 1925,4130 2760,4130 3488,4130 4250,4130 ; 4254,4134 4250,4130 ; v1(4955,4121) 4259,4121 4250,4130
  Top Layer w15: D1.2 1888,4167 1925,4130 ; D2.2 2652,4246 2760,4138 2760,4130 ; D3.2 3420,4198 3488,4130 ; D4.2 4178,4210 4254,4134 ; v1(4464,4932) 4534.05,5002.05 v2(4534.05,5168) 4538,5171.95 4534.05,5175.9 4534.05,5263.95 IC1.25@4514,5284
  Bottom Layer w10: v2(3438.81,5489.19) 3441.63,5486.37 3633.63,5486.37 3826,5294 4231.84,5294 4369.84,5156 4440.78,5156 4442.78,5158 4506.62,5158 4508.36,5159.74 4525.79,5159.74 v2(4534.05,5168)
  Bottom Layer w15: v1(4464,4932) 4698,4932 4954,4676 4954,4122 v1(4955,4121)
IO2: IC1.24 P2.3 | length 2436.5
  Top Layer w15: P2.3 2475.79,4914.21 2475.79,4874.21 2568,4782 3311.65,4782 3523.65,4994 3678,4994 v2(3730,5046) ; v2(4382,5010) IC1.24
  Bottom Layer w15: v2(3730,5046) 3846,5162 4230,5162 4380,5012 4382,5012 v2(4382,5010)
IO18: IC1.30 P2.2 | length 3038.3
  Top Layer w15: IC1.30 4493.02,5526 4493.89,5526.87 4605.57,5526.87 v2(4606.06,5526.38) v2@4607.69,5528
  Bottom Layer w10: P2.2 2734.13,4755.87 3189.87,4755.87 3374.5,4940.5 3374.5,5186.5 3374.5,5508.5 3460.11,5594.11 3637.89,5594.11 3638.13,5593.87 3647.28,5593.87 3754.52,5486.63 3791.82,5486.63 3889.82,5388.63 4278.63,5388.63 4416.38,5526.38 v2(4606.06,5526.38)
LEDS: IC1.28 U2.4 | length 3569.7
  Top Layer w15: IC1.28@4491.65,5434 4576.59,5434 4629.75,5380.84 4629.75,4809.75 4590.7,4770.7 4590.7,4748.7 v1(4584,4742)
  Bottom Layer w12: U2.4 2440,3920 2412.82,3947.18 2412.82,4054.82 2575,4217
  Bottom Layer w15: 2575,4217 2575,4379 2802.63,4606.63 4448.63,4606.63 v1(4584,4742)
LEDs2: IC1.37 LED5.4 | length 293.4
  Top Layer w15: IC1.37 4709.92,5877.37 4740.97,5846.32 4740.97,5842.19 4753.16,5830 LED5.4
NetC9_2: C9.2 IC3.3 R11.2 R12.1 | length 268.1
  Top Layer w10: R11.2 2378.62,5350.18 2401.84,5350.18 2413.66,5362 R12.1 ; 2418.92,5403.5 2420,5404.57 2420,5384.44 2428.74,5375.7 2433.66,5375.7 2442.44,5366.92 R12.1 ; IC3.3@2418.92,5438 2418.92,5445.15 2418.92,5452.31 IC3.3 ; C9.2 2460.09,5294.51 2442.44,5312.17 R12.1
  Top Layer w15: IC3.3@2416,5438 IC3.3@2418.92,5438 ; 2418.92,5403.5 IC3.3@2418.92,5438 ; IC3.3@2422.38,5438 IC3.3@2418.92,5438
NetD1_1: D1.1 S1.1 | length 201.5
  Top Layer w12: D1.1@1888,4440.86 1893.43,4435.43 2079.57,4435.43 S1.1
NetD2_1: D2.1 S2.1 | length 187
  Top Layer w12: D2.1@2658,4430 S2.1
NetD3_1: D3.1 S3.1 | length 179
  Top Layer w12: D3.1@3426,4430 S3.1
NetD4_1: D4.1 S4.1 | length 188.8
  Top Layer w12: D4.1@4180,4420.86 4189.14,4430 S4.1
NetD5_1: D5.1 R10.2 | length 57
  Top Layer w10: R10.2@2936,6089.59 R10.2@2936.51,6089.08
  Top Layer w15: D5.1 2937,6144.43 2937,6090.99 R10.2@2938,6089.99
NetD6_2: D6.2 IC3.1 L1.2 | length 361.5
  Top Layer w15: 2165.55,5289.56 2152.69,5289.56 2146,5296.25 2146,5418.63 L1.2 ; L1.2@2190,5458 IC3.1@2344.6,5458
NetD7_1: D7.1 S7.1 | length 186
  Top Layer w12: D7.1 1909.14,3670 S7.1
NetD8_1: D8.1 S8.1 | length 189
  Top Layer w12: D8.1@2656,3670 S8.1
NetD9_1: D9.1 S9.1 | length 193
  Top Layer w12: D9.1@3412,3670 S9.1
NetD10_1: D10.1 S10.1 | length 191
  Top Layer w12: D10.1@4174,3670 S10.1
NetD11_2: D11.2 Q1.3 | length 182.5
  Top Layer w15: Q1.3 2642.17,5404 2726,5320.17 D11.2 D11.2@2733.1,5272
NetD12_2: D12.2 J1.1 | length 501.4
  Top Layer w15: D12.2 3116,6040.21 3124.25,6031.96 3178.16,5978.05 3410.05,5978.05 3450.93,6018.93 3450.93,6135.33 J1.1
NetD13_1: D13.1 S13.1 | length 195
  Top Layer w12: D13.1@1890,2910 S13.1
NetD14_1: D14.1 S14.1 | length 195
  Top Layer w12: D14.1@2650,2910 S14.1
NetD15_1: D15.1 S15.1 | length 183
  Top Layer w12: D15.1@3422,2910 S15.1
NetD16_1: D16.1 S16.1 | length 160
  Top Layer w12: D16.1@4205,2910 S16.1
NetD17_1: D17.1 R19.2 | length 56.6
  Top Layer w15: R19.2 D17.1
NetD19_1: D19.1 S19.1 | length 189
  Top Layer w12: D19.1@1896,2150 S19.1
NetD20_1: D20.1 S20.1 | length 193
  Top Layer w12: D20.1@2652,2150 S20.1
NetD21_1: D21.1 S21.1 | length 183
  Top Layer w12: D21.1@3422,2150 S21.1
NetD22_1: D22.1 S22.1 | length 160
  Top Layer w12: D22.1@4205,2150 S22.1
NetENC1_1: ENC1.1 R3.2 | length 127.8
  Top Layer w15: ENC1.1@1734,5455 R3.2@1734,5582.8
NetENC2_1: ENC2.1 R6.2 | length 138.8
  Top Layer w15: R6.2 4805.56,5585.08 4811.84,5578.8 4812.45,5578.8 4821.23,5570.01 4821.23,5464.77 ENC2.1
NetIC2_1: IC2.1 R9.2 | length 68.1
  Top Layer w10: IC2.1 2737,6169 R9.2
NetIC2_2: IC2.2 R8.2 | length 65.4
  Top Layer w10: IC2.2 2687,6174.74 R8.2
NetIC3_4: IC3.4 R13.1 | length 35.8
  Top Layer w15: IC3.4 2421.93,5553.74 R13.1@2421.93,5585.93
NetIC4_8: IC4.8 R20.2 R23.2 | length 181
  Top Layer w10: R23.2 2748.12,5641 2748.12,5703 R20.2 2749.12,5708.92 2783.88,5743.69 2795.02,5743.69 IC4.8
NetIC4_9: IC4.9 R22.2 | length 305.9
  Top Layer w10: R22.2 2811.22,5503.04 2803.09,5503.04 2778.91,5527.22 2778.91,5702.3 2800.62,5724 IC4.9
NetIC4_11: IC4.11 R21.2 | length 263.6
  Top Layer w10: IC4.11 2845.09,5683.72 2805.86,5683.72 2800,5677.87 2800,5572 2822.15,5549.85 2864.3,5507.7 2864.3,5507.04 2873.08,5498.26 R21.2
NetLED1_2: LED1.2 LED2.4 | length 1687.9
  Bottom Layer w12: LED1.2 1903,2365 1834,2434 1834,3789 1935,3890 LED2.4
NetLED1_4: LED1.4 U6.2 | length 307.3
  Top Layer w12: v3(2292,2490) 2380.5,2401.5 2406.5,2401.5 v3(2414,2394)
  Bottom Layer w12: LED1.4 v3(2292,2490) ; v3(2414,2394) 2417,2397 2492,2397 U6.2
NetLED2_2: LED2.2 LED3.4 | length 2382.8
  Top Layer w12: v3(2285,4070) 4342.35,4070 4372.35,4040 v3(4374,4040)
  Bottom Layer w12: LED2.2 2240.47,4025.47 v3(2285,4070) ; v3(4374,4040) 4381.5,4032.5 4381.5,3998.66 4490.16,3890 LED3.4
NetLED3_2: LED3.2 LED4.4 | length 1666.9
  Bottom Layer w12: LED4.4 4815,2490 4872,2547 4872,3966 4823,4015 LED3.2
NetLED5_2: LED5.2 LED6.4 | length 5030.7
  Top Layer w15: LED6.4 1962,5707 2033,5707 v1(2036,5704) ; v1(5033,5645) LED5.2
  Bottom Layer w10: v1(2036,5704) 2036,5698 1840,5502 1840,5158 2260,4738 3222,4738 3392.37,4908.37 3392.37,5501.1 3467.28,5576 3639.87,5576 3850.12,5365.76 4513.76,5365.76 4793,5645 v1(5033,5645)
NetQ2_1: Q2.1 R24.2 | length 69.5
  Top Layer w15: Q2.1 3049.87,5396.13 3049.87,5331.87 R24.2
NetQ3_1: Q3.1 R25.1 | length 460.6
  Top Layer w10: R25.1 2936,5346 2986,5296 3156,5296 3202,5342 Q3.1
NetU2_2: U2.2 U3.4 | length 1306.5
  Top Layer w12: v3(2975,3980) 3875,3980 3937,3918 v3(3940,3918)
  Bottom Layer w12: U2.2 v3(2975,3980) ; v3(3940,3918) 3941,3919 4014,3919 U3.4
NetU3_2: U3.2 U4.4 | length 1804.8
  Bottom Layer w12: U4.4 4305,2460 4405,2560 4405,2850 4455,2900 4455,2950 4405,3000 4405,3610 4435,3640 4435,3911 4366,3980 U3.2
NetU4_2: U4.2 U5.4 | length 885.3
  Bottom Layer w12: U5.4 3635,2460 3765,2330 3765,2220 3805,2180 3955,2180 4015,2240 U4.2
NetU5_2: U5.2 U6.4 | length 934.6
  Bottom Layer w12: U6.4 2855,2460 2955,2360 2955,2220 3005,2170 3225,2170 3255,2200 U5.2
"row 1": D7.2 D8.2 D9.2 D10.2 IC1.26 | length 6377.5
  Top Layer w12: 1934,3370 2730,3370 3492,3370 4205,3370 4968.37,3370 v1(4970.37,3372)
  Top Layer w15: D7.2 1902,3402 1934,3370 ; D8.2 2656,3444 2730,3370 ; D9.2 3418,3444 3492,3370 ; D10.2 4174,3401 4205,3370 ; IC1.26@4466.02,5335.03 4524.97,5335.03 4576,5284 4576,4913.84 4561.63,4899.47 v1(4561.63,4890)
  Bottom Layer w15: v1(4561.63,4890) 4694,4890 4906,4678 4906,4090.35 4970.37,4025.97 v1(4970.37,3372)
"row 2": D13.2 D14.2 D15.2 D16.2 IC1.29 | length 7320.1
  Top Layer w12: 1935,2610 2730,2610 3504,2610 4258,2610 4950,2610 v1(4954,2614)
  Top Layer w15: D13.2 1898,2647 1935,2610 ; D14.2 2650,2690 2730,2610 ; D15.2 3422,2692 3504,2610 ; D16.2 4188,2680 4258,2610 ; IC1.29@4466.02,5485.03 4598.97,5485.03 4652.63,5431.37 4652.63,5144.06 4676,5120.69 v1(4676,4756)
  Bottom Layer w15: v1(4676,4756) 4778,4756 4864,4670 4864,4062 4930,3996 4930,3326.9 4954,3302.9 v1(4954,2614)
"row 3": D19.2 D20.2 D21.2 D22.2 IC1.14 | length 7949.6
  Top Layer w12: D19.2@1898,2088.4 1898,1891.31 1898,1867.11 1915.11,1850 v1(2694,1850) v1@2696,1850 ; D20.2@2652,2082.3 2652,1894 v1@2696,1850 ; D21.2@3414,2091.1 3414,1926 3338,1850 ; D22.2 4198,1884 4164,1850 3338,1850 ; v1@2696,1850 3338,1850
  Top Layer w15: v1(3606.7,5044.34) 3606,5045.04 3606,5174 3717.03,5285.03 IC1.14@3796.72,5285.03
  Bottom Layer w12: v1(2694,1850) 2635,1850 2555,1930 2555,2151 2354,2352 2354,2514 2354,2892 2414,2952 2414,3068 2372,3110 2372,3648 2404,3680 2404,3816 2380,3840 2380,3905 2380,4116 2524,4260 2524,4390 2800,4666 3422,4666 3606,4850 3606,5043.64 v1(3606.7,5044.34)
RTS: IC4.24 Q2.2 R25.2 | length 362.2
  Top Layer w10: R25.2 3003.79,5494.26 Q2.2@3010.6,5487.45 ; Q2.2 Q2.2@3010.6,5487.45 ; IC4.24 3083.06,5664.94 3102,5646 3102,5574 3032.22,5504.22 3017.41,5504.22 3010.6,5497.41 Q2.2@3010.6,5487.45
RX: IC1.35 IC4.26 | length 2177.9
  Top Layer w10: IC4.26@3020.74,5704 3100.57,5704 3121.55,5724.98 v2(3128,5724.98)
  Top Layer w15: IC1.35 4494.96,5780.69 4640.69,5780.69 v2(4644,5784)
  Bottom Layer w10: v2(3128,5724.98) 3132.98,5724.98 3204,5796 3410.72,5796 3412.85,5793.87 3491.96,5793.87 3547.96,5737.87 3695.57,5737.87 3985.19,5448.25 4262.42,5448.25 4440.04,5625.87 4602.81,5625.87 4633.75,5656.81 4633.75,5699.09 4621.86,5710.98 4621.86,5750.18 4644,5772.32 v2(4644,5784)
SCL: IC1.36 P1.3 PCB1.3 R14.1 | length 3255.3
  Top Layer w10: v1(3312.24,5696.13) 3368,5751.88 PCB1.3
  Top Layer w15: R14.1 3310.12,5592.98 3310.12,5694.01 v1(3312.24,5696.13) ; IC1.36 4493.14,5825.87 4574.5,5825.87 v1(4576,5824.37)
  Bottom Layer w10: P1.3 2490,5144 2687.75,5341.75 2949.75,5341.75 3010.87,5402.87 3212,5402.87 3224.38,5415.25 3224.38,5530.38 3312.24,5618.24 v1(3312.24,5696.13) ; PCB1.3 3372,5860 3420.25,5811.75 3499.36,5811.75 3555.36,5755.75 3702.97,5755.75 3992.6,5466.13 4254.13,5466.13 4431.75,5643.75 4595.4,5643.75 4615.87,5664.22 4615.87,5691.69 4576,5731.56 v1(4576,5824.37)
SDA: IC1.33 P1.4 PCB1.4 R15.1 | length 2889.1
  Top Layer w10: R15.1 3362.13,5592.99 3362.13,5639.14 ; 3363.13,5639.14 3363.13,5687.92 v1(3370.1,5694.89) 3370.1,5695.55 3468,5793.45 PCB1.4
  Top Layer w15: IC1.33 4493.77,5679.5 4570.25,5679.5 v1(4572.38,5681.62)
  Bottom Layer w10: P1.4 2596.53,5108.53 2596.53,5146.53 2773.87,5323.87 2993.87,5323.87 3055,5385 3235,5385 3250,5400 3250,5519.28 3370.1,5639.38 3370.1,5685.95 3374.57,5690.42 v1(3370.1,5694.89) ; PCB1.4 3476.39,5860 3562.77,5773.62 3710.38,5773.62 4000,5484 4246.72,5484 4438.72,5676 4566.76,5676 v1(4572.38,5681.62)
STD: IC2.6 R10.1 | length 542
  Top Layer w10: v1(2626.37,5820) 2631.69,5825.31 2631.69,5891.92 IC2.6 ; v1(2877.57,6031.57) 2879.35,6033.35 2934.21,6033.35 R10.1
  Bottom Layer w10: v1(2877.57,6031.57) 2877.57,5971.69 2791.87,5886 2662,5886 2653.37,5877.37 2628,5852 v1@2628,5828.06 ; v1@2628,5828.06 2626.37,5826.44 v1(2626.37,5820) 2628,5821.63 v1@2628,5828.06
TX: IC1.34 IC4.25 | length 2143.9
  Top Layer w10: IC4.25@3028.04,5685.54 3161.67,5685.54 3190.13,5714 v2(3190.55,5714)
  Top Layer w15: IC1.34 4492,5727.02 4659.38,5727.02 v1(4659.73,5726.67)
  Bottom Layer w10: v2(3190.55,5714) 3192,5714 3254,5776 3484.56,5776 3540.56,5720 3688.17,5720 3977.79,5430.38 4269.82,5430.38 4447.44,5608 4610.21,5608 4659.73,5657.52 v1(4659.73,5726.67)
V_BOOST: C9.1 C11.2 D6.1 Q1.2 R12.2 | length 445.6
  Top Layer w10: R12.2 2502.16,5366.6 2550.31,5366.6 Q1.2
  Top Layer w15: D6.1 2307.79,5270 2353.79,5224 2456.51,5224 C9.1 2467.49,5232 2528.7,5232 2536.85,5240.15 C11.2@2536.85,5250.15 ; C11.2 2550.31,5259.46 Q1.2@2550.31,5366.6
VBAT: C10.2 IC2.5 IC2.8 IC3.5 J2.2 L1.1 R13.2 R16.2 | length 1511.9
  Top Layer w10: 2365.16,5704.4 2389.56,5680 ; R13.2@2406.3,5658.34 2415.08,5649.56 R13.2 ; R16.2 2488,5632.26 C10.2@2488,5677.05
  Top Layer w15: L1.1 2196.63,5548 2344.6,5548 2345.14,5548.55 2345.14,5678.49 2329.41,5694.22 ; 2365.16,5704.4 2331.56,5704.4 2325.46,5710.49 2319.37,5716.58 2319.37,5753.47 J2.2@2319.37,5757.81 ; 2389.56,5680 2466.7,5680 2480.85,5694.15 C10.2 ; C10.2@2486.06,5686 C10.2@2495,5677.05 ; IC2.5 2586,5896.23 2586,5820 2566,5800 2331.56,5800 2319.37,5787.81 J2.2@2319.37,5757.81 ; IC2.8 IC2.8@2737.06,5897.17 ; IC2.8@2740,5878.82 2740,5820 2682.37,5762.37 2661.95,5762.37 2661.58,5762 2323.56,5762 J2.2@2319.37,5757.81
pads on no net: ENC1. ENC2. IC1.4 IC1.5 IC1.17 IC1.18 IC1.19 IC1.20 IC1.21 IC1.22 IC1.32 IC4.1 IC4.2 IC4.10 IC4.12 IC4.13 IC4.14 IC4.15 IC4.16 IC4.17 IC4.18 IC4.19 IC4.20 IC4.21 IC4.22 IC4.23 IC4.27 J1.4 LED4.2 LED6.2 S1. S2. S3. S4. S5.A2 S5.B1 S7. S8. S9. S10. S13. S14. S15. S16. S19. S20. S21. S22.

## Polygon pours and split planes (outlines as drawn)
GND on Top Layer "Top Layer-gnd" (solid, pour order 3): 5205,1510 1515,1510 1505,1500 1505,1510 1505,6310 5205,6310 5205,1510
3V3 on Top Layer "NONET_L02_P-001" (solid, pour order 2): 2980,5284 2978,5282 2978,5174 3260,5174 3276,5158 3276,5104 3294,5086 3404,5086 3404,5330 3272,5330 3228,5286 2990,5286
VBAT on Top Layer "NONET_L02_P-001" (solid, remove dead copper, pour order 1): 2595.8,5928 2524,5928 2462,5866 2310,5866 2268,5824 2268,5624 2242,5598 2128,5598 2098,5568 2098,5508 2106,5500 2360,5500 2370,5510 2364,5516 2364,5630 2370,5636 2372,5634 2444,5634 2470,5608 2510,5608 2510,5702 2510,5748 2686,5748 2752,5814 2752,5926 2720,5926 2720,5814 2682,5776 2604,5776 2589.97,5790.03
GND on Bottom Layer "Bottom Layer-GND" (solid, pour order 0): 1505,6310 5205,6310 5205,4530 5205,4460 5205,3030 5205,1580 5205,1510 1505,1510 1505,2280 1505,4090 1505,4870 1505,4950 1505,6260 1505,6310

## Keep-outs
Top Layer:
  region: 3674,6289 3676,6287 4690,6287 4690,5993 4674,5993 3672,5993
Bottom Layer:
  region: 3678,6290 3678,6006 3684,6000 4696,6000 4696,6292 4694,6294
Keep-Out Layer:
  lines w10: 1518,6288 2092,6288 2178,6288 ; 2182,6284 2182,6116 2190,6108 2328,6108 2332,6112 2332,6220 2320,6232 2270,6232 2256,6246 2256,6288 5184,6288
  lines w12: 1516,6286 1516,1524 5190,1524 5190,6288 ; 2546,2370 2684,2370 2684,2492 2546,2492 2546,2370 ; 2546,3890 2684,3890 2684,4012 2546,4012 2546,3890 ; 3306,2370 3444,2370 3444,2492 3306,2492 3306,2370 ; 4066,2370 4204,2370 4204,2492 4066,2492 4066,2370 ; 4066,3890 4066,4012 4204,4012 4204,3890 4066,3890

## Silkscreen, mask and mechanical layers (free items; w line width, h text height)
Top Overlay:
  lines w10: 2182,6280 2182,6112 2186,6108 2328,6108 2330,6110 2330,6222 2320,6232 2274,6232 2254,6252
  text "SCL" at 3379.56,5912 h40 r90
  text "SDA" at 3457.56,5910 h40 r90
  text "3V3" at 3277.56,5908 h40 r90
  text "GND" at 3191.56,5904 h40 r90
  text "INT" at 2696,4990 h40 r90
  text "3V3" at 2301.56,4982 h40 r90
  text "SCL" at 2499.56,4978 h40 r90
  text "SDA" at 2601.56,4978 h40 r90
  text "GND" at 2401.56,4976 h40 r90
  text "5V" at 2687.56,4800 h40 r90
  text "IO2" at 2489.56,4792 h40 r90
  text "IO18" at 2577.56,4782 h40 r90
  text "GND" at 2383.56,4780 h40 r90

## Text inside footprints (layer, text, board x,y; h text height)
PCB1: Document "SSD1306 128x64" at 2945.9,4866 h62.99; Document "SDA" at 3412.3,5768.1 h31.5; Document "SCL" at 3319.8,5768.5 h31.5; Document "GND" at 3117.9,5767.7 h31.5; Document "VCC" at 3215.53,5767.7 h31.5
S1: Document "1u" at 1875.04,3980 h78.74 r90
S2: Document "1u" at 2635.04,3980 h78.74 r90
S3: Document "1u" at 3395.04,3980 h78.74 r90
S4: Document "1u" at 4155.04,3980 h78.74 r90
S7: Document "1u" at 1875.04,3220 h78.74 r90
S8: Document "1u" at 2635.04,3220 h78.74 r90
S9: Document "1u" at 3395.04,3220 h78.74 r90
S10: Document "1u" at 4155.04,3220 h78.74 r90
S13: Document "1u" at 1875.04,2460 h78.74 r90
S14: Document "1u" at 2635.04,2460 h78.74 r90
S15: Document "1u" at 3395.04,2460 h78.74 r90
S16: Document "1u" at 4155.04,2460 h78.74 r90
S19: Document "1u" at 1875.04,1700 h78.74 r90
S20: Document "1u" at 2635.04,1700 h78.74 r90
S21: Document "1u" at 3395.04,1700 h78.74 r90
S22: Document "1u" at 4155.04,1700 h78.74 r90